# Altium PCB CDS_JETSON_ADAPTER_PCB_v1.0.2.PcbDoc
Units mm, origin at the board's own origin, x right, y up, seen from the top; angles counter-clockwise.
Board outline 70 x 50 mm, 2 copper layers (Top Layer, Bottom Layer); 71 components, 58 nets, 289 pads, 162 vias.
Unrouted connection lines stored in the file: 53.
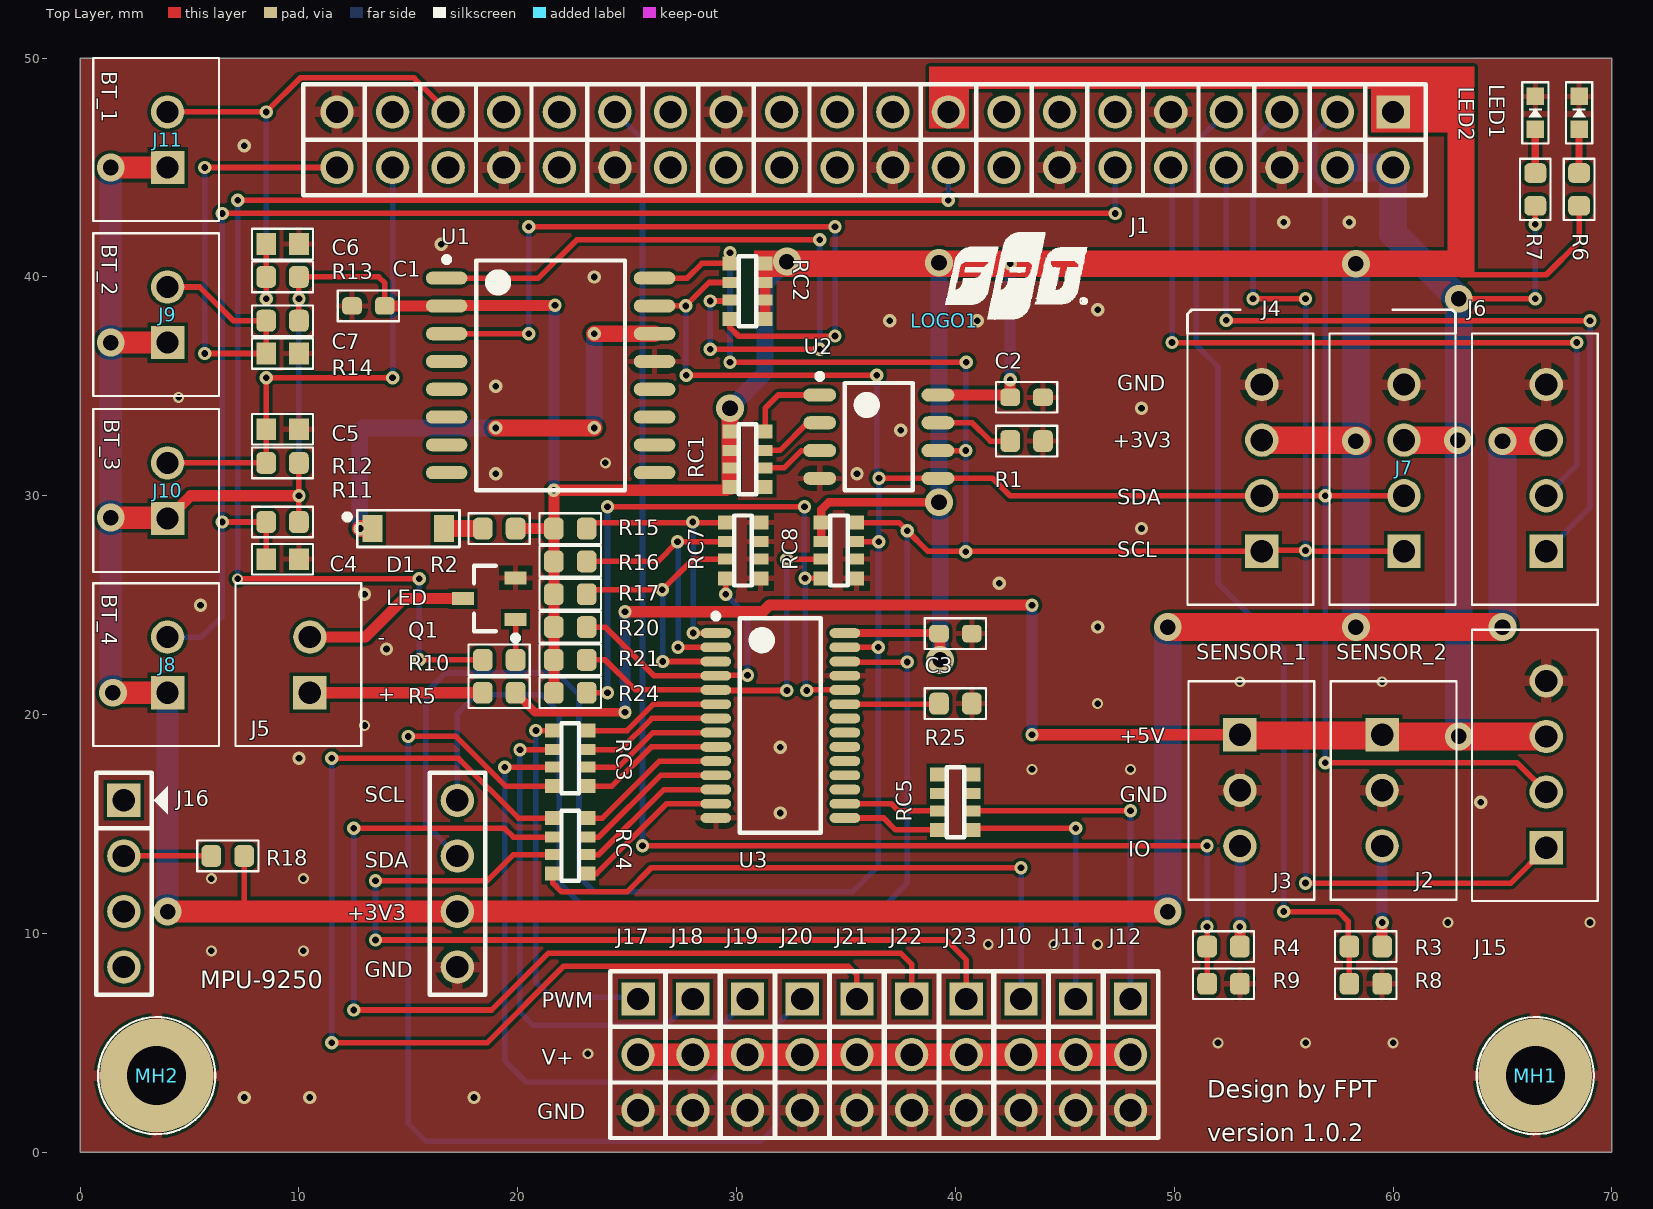
[diagram p0: Top Layer view]
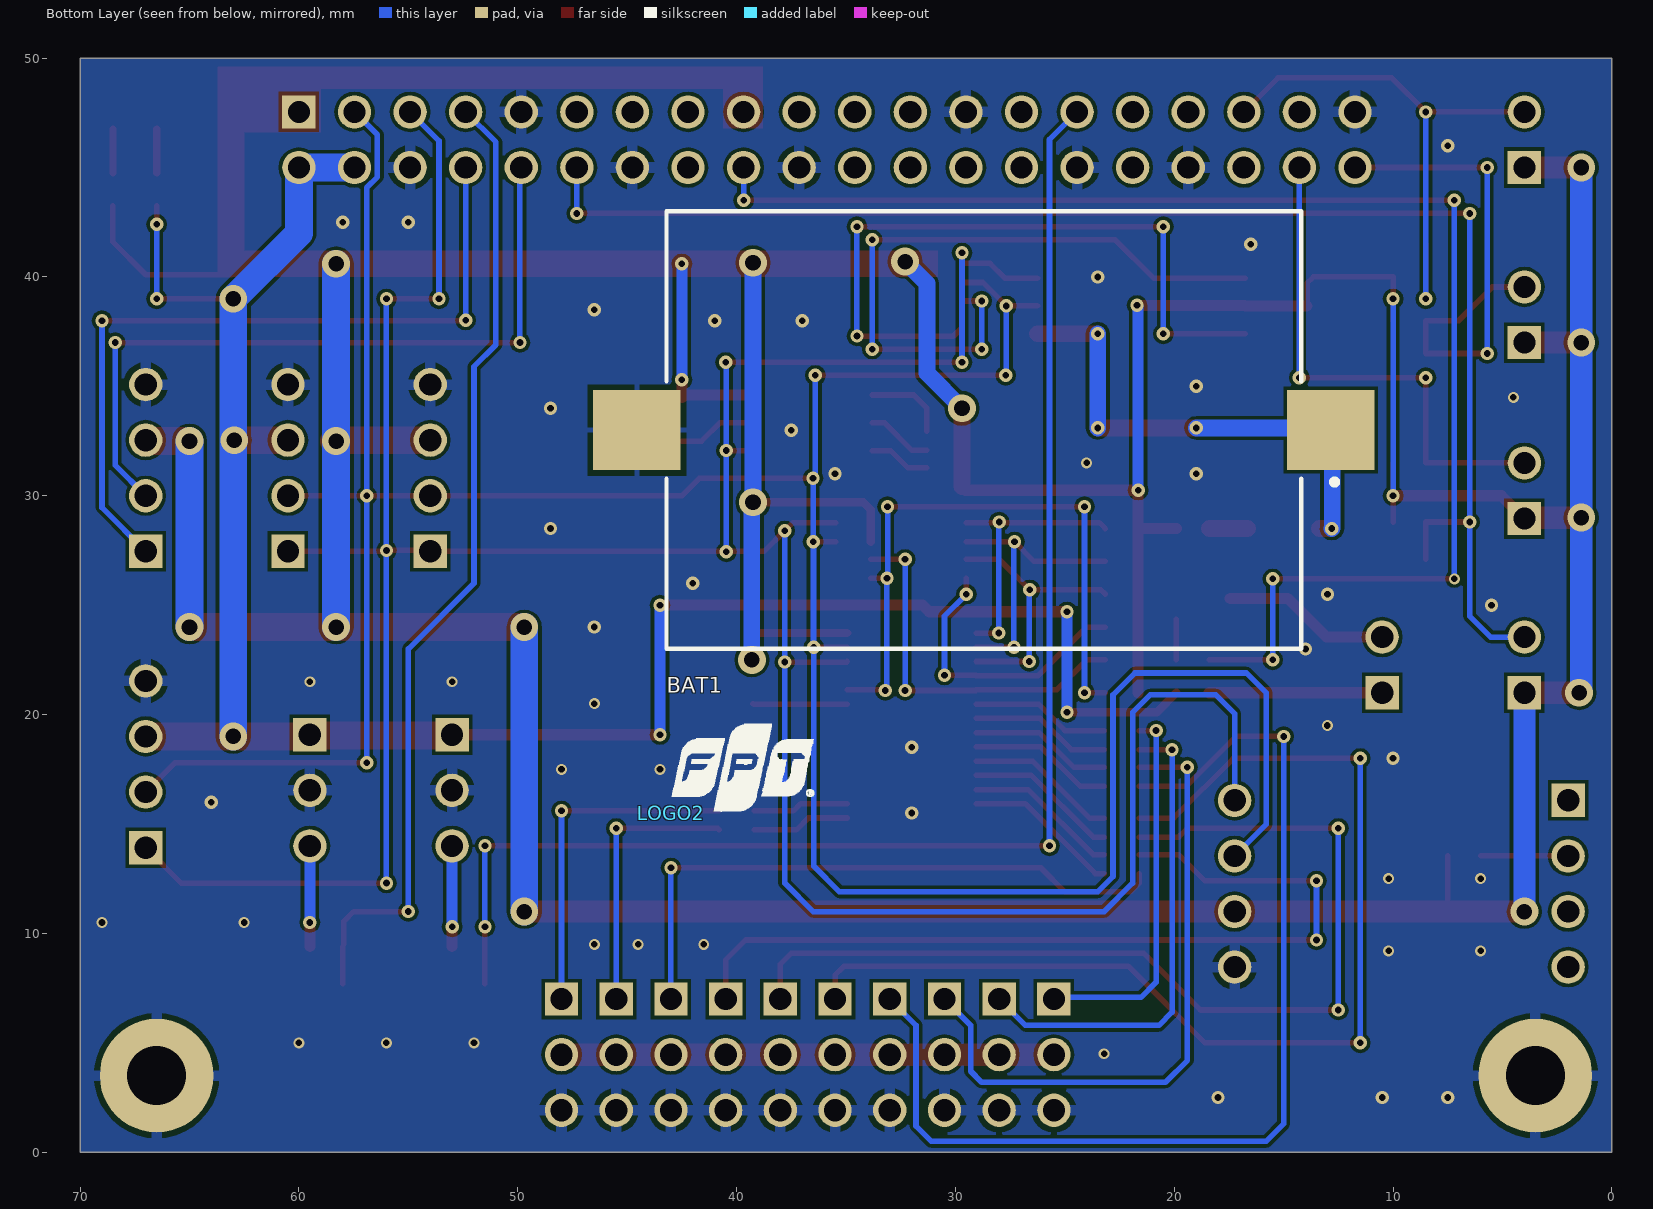
[diagram p1: Bottom Layer view, seen from below]

## Layer stack, top to bottom
Top Solder: solder mask 0.0102, Solder Resist, Dk 3.5
Top Layer: signal copper 0.0356
Dielectric 1: dielectric 0.32, FR-4, Dk 4.8
Bottom Layer: signal copper 0.0356
Bottom Solder: solder mask 0.0102, Solder Resist, Dk 3.5

## Board outline
0,0 70,0 70,50 0,50

## Design rules (kind name [scope] priority, off if disabled: settings)
Clearance [All] p1: gap=0.152 ignorepadtopadclearanceinfootprint=FALSE
PolygonConnect [All] p1: thpad.connectstyle=Relief thpad.reliefconductorwidth=0.508 thpad.reliefentries=4 thpad.polygonreliefangle="90 Angle" thpad.airgapwidth=0.254 smdpad.connectstyle=Relief smdpad.reliefconductorwidth=0.254 smdpad.reliefentries=4 smdpad.polygonreliefangle="90 Angle" smdpad.airgapwidth=0.254 via.connectstyle=Direct via.reliefconductorwidth=0.254 via.reliefentries=4 via.polygonreliefangle="90 Angle" via.airgapwidth=0.254
RoutingVias [All] p1: holewidth=0.711 width=1.27 viastyle="Through Hole" minholewidth=0.3 minwidth=0.5 maxholewidth=0.711 maxwidth=1.27
SolderMaskExpansion [All] p1: expansion=0.102
Width [All] p1: maxlimit=1.27 minlimit=0.203 preferedwidth=0.254
30 further rules are at their usual default settings.

## Components (designator, comment, footprint, x,y, rotation, side; value= is the part's Value field where it differs from the comment)
BAT1 "BU2032SM-HD-G" BU2032SM-HD-G 28.7,33 r0 bottom locked
C1 "GRM188R61A106ME69D" C0603#1 13.175,38.675 r180 top value=1uF
C2 "GRM188R70J104KA01D" C0603#1 43.25,34.5 r180 top value=0.1uF
C3 "GRM188R61C106KAALD" C0603#1 40,23.7 r0 top value=10uF
C4 "GCM188R71H104KA57J" C0603#2 9.25,27.1 r180 top value=0.1uF
C5 "GCM188R71H104KA57J" C0603#2 9.25,33.04 r180 top value=0.1uF
C6 "GCM188R71H104KA57J" C0603#2 9.25,41.5 r180 top value=0.1uF
C7 "GCM188R71H104KA57J" C0603#2 9.25,36.5 r180 top value=0.1uF
D1 "1N4148W-7-F" DO-SOD-123 15,28.5 r0 top
J1 "HDR_2x20" HEADER_SOCKET_2.54MM_2x20 60,47.54 r180 top
J2 "HDR_1x3" B3B-XH-A(LF)(SN) 59.5,16.54 r270 top
J3 "HDR_1x3" B3B-XH-A(LF)(SN) 53,16.54 r270 top
J4 "HDR_1x4" B4B-XH-A(LF)(SN) 54,27.46 r90 top
J5 "HDR_1x2" B2B-XH-A(LF)(SN) 10.5,21 r90 top
J6 "HDR_1x4" B4B-XH-A(LF)(SN) 67,27.46 r90 top
J7 "HDR_1x4" B4B-XH-A(LF)(SN) 60.5,27.46 r90 top
J8 "HDR_1x2" B2B-XH-A(LF)(SN) 4,21 r90 top
J9 "HDR_1x2" B2B-XH-A(LF)(SN) 4,37 r90 top
J10 "HDR_1x2" B2B-XH-A(LF)(SN) 4,28.96 r90 top
J10 "HDR_1x3" PINHEAD_2.54mm_1x3 43,7 r270 top
J11 "HDR_1x2" B2B-XH-A(LF)(SN) 4,45 r90 top
J11 "HDR_1x3" PINHEAD_2.54mm_1x3 45.5,7 r270 top
J12 "HDR_1x3" PINHEAD_2.54mm_1x3 48,7 r270 top
J15 "HDR_1x4" B4B-XH-A(LF)(SN) 67,13.92 r90 top
J16 "SOCKET_MPU_9250" SOCKET_MPU_9250 2,16.08 r0 top locked
J17 "HDR_1x3" PINHEAD_2.54mm_1x3 25.5,7 r270 top
J18 "HDR_1x3" PINHEAD_2.54mm_1x3 28,7 r270 top
J19 "HDR_1x3" PINHEAD_2.54mm_1x3 30.5,7 r270 top
J20 "HDR_1x3" PINHEAD_2.54mm_1x3 33,7 r270 top
J21 "HDR_1x3" PINHEAD_2.54mm_1x3 35.5,7 r270 top
J22 "HDR_1x3" PINHEAD_2.54mm_1x3 38,7 r270 top
J23 "HDR_1x3" PINHEAD_2.54mm_1x3 40.5,7 r270 top
LED1 "LTST-C191KRKT" LED-SMD-0603-RED 68.5,47.5 r270 top
LED2 "LTST-C191KRKT" LED-SMD-0603-RED 66.5,47.5 r270 top
LOGO1 "LOGOFPT" LOGO_FPT 39.5,38 r0 top
LOGO2 "LOGOFPT" LOGO_FPT 43,15.5 r180 bottom
MH1 "MTH27" MH_5.2MMD_2.7MMD 66.5,3.5 r0 top locked
MH2 "MTH27" MH_5.2MMD_2.7MMD 3.5,3.5 r0 top locked
Q1 "MMBT3904" MMBT3904 18.7,25.3 r180 top
R1 "RC0603JR-074K7L" R0603 43.25,32.5 r0 top value=4.7K
R2 "RC0603JR-07200RL" R0603 19.15,28.5 r180 top value=200R
R3 "RC0603JR-07200RL" R0603 58.75,9.4 r0 top value=200R
R4 "RC0603JR-07200RL" R0603 52.25,9.4 r0 top value=200R
R5 "RC0603FR-071KL" R0603 19.15,21 r180 top value=1K
R6 "RC0603FR-071KL" R0603 68.5,44 r90 top value=1K
R7 "RC0603FR-071KL" R0603 66.5,44 r90 top value=1K
R8 "RC0603FR-073K3L" R0603 58.75,7.7 r0 top value=3.3K
R9 "RC0603FR-073K3L" R0603 52.25,7.7 r0 top value=3.3K
R10 "RC0603JR-0710KL" R0603 19.15,22.5 r0 top value=10K
R11 "RC0603JR-0710KL" R0603 9.25,28.8 r0 top value=10K
R12 "RC0603JR-0710KL" R0603 9.25,31.5 r0 top value=10K
R13 "RC0603JR-0710KL" R0603 9.25,40 r0 top value=10K
R14 "RC0603JR-0710KL" R0603 9.25,38 r0 top value=10K
R15 "RC0603JR-070RL" R0603 22.4,28.5 r0 top value=0R
R16 "RC0603JR-070RL" R0603 22.4,27 r0 top value=0R
R17 "RC0603JR-070RL" R0603 22.4,25.5 r0 top value=0R
R18 "RC0603JR-0710KL" R0603 6.75,13.54 r180 top value=10K
R20 "RC0603JR-070RL" R0603 22.4,24 r0 top value=0R
R21 "RC0603JR-070RL" R0603 22.4,22.5 r0 top value=0R
R24 "RC0603JR-070RL" R0603 22.4,21 r0 top value=0R
R25 "RC0603JR-0710KL" R0603 40,20.5 r0 top value=10K
RC1 "YC164-JR-074K7L" RC_1206 30.5,31.675 r90 top value=4.7K
RC2 "YC164-JR-074K7L" RC_1206 30.5,39.345 r270 top value=4.7K
RC3 "YC164-JR-07220RL" RC_1206 22.4,18 r270 top value=220R
RC4 "YC164-JR-07220RL" RC_1206 22.4,14 r270 top value=220R
RC5 "YC164-JR-07220RL" RC_1206 40,16 r90 top value=220R
RC7 "YC164-JR-0710KL" RC_1206 30.3,27.5 r90 top value=10K
RC8 "YC164-JR-0710KL" RC_1206 34.673,27.5 r90 top value=10K
U1 "DS3231S#T&R" SOIC127P1030X265-16N 21.5,35.5 r0 top
U2 "CAT24C32WI-GT3" SOIC127P600X175-8N 36.5,32.7 r0 top
U3 "PCA9685PW" TSOP65P640X110-28N 32,19.5 r0 top

## Footprints (in the part's own frame and the unit in brackets; to place one, negate y for a bottom-side part, rotate by r counter-clockwise, add the part's x,y. Pads: shape width x height; smd on the part's side, far side on the other; paste and mask are expansions set on the pad)
B2B-XH-A(LF)(SN) [mil] "CONN HEADER XH TOP 2POS 2.5MM"
  rect 60x60 hole 40: 1(0,0)
  round 60 hole 40: 2(100,0)
  silkscreen extent -96,-93 197,134, body extent -96,-93 195,134, height 276
B3B-XH-A(LF)(SN) [mil]
  rect 60x60 hole 40: 1(-100,0)
  round 60 hole 40: 2(0,0) 3(100,0)
  silkscreen extent -196,-93 197,134, body extent -195,-93 195,133, height 276
B4B-XH-A(LF)(SN) [mil]
  rect 60x60 hole 40: 1(0,0)
  round 60 hole 40: 2(100,0) 3(200,0) 4(300,0)
  silkscreen extent -96,-93 392,134, body extent -96,-93 392,134, height 276
BU2032SM-HD-G [mm] "SODFL, 2-Leads, Body 20.00x32.00mm, IPC Medium Density"
  rect 4x3.65 smd: 1(-15.858,0) 2(15.858,0)
  silkscreen extent -16.15,-10 14.5,10, body extent -16,-10 16,10, height 5.3
C0603#1 [mm]
  rrect50% 0.9x0.8 smd: 1(-0.75,0) 2(0.75,0)
  silkscreen extent -1.4,-0.7 1.4,0.7, body extent -0.8,-0.4 0.8,0.41, height 0.87
C0603#2 [mm]
  rect 0.9x1 smd: 1(-0.75,0) 2(0.75,0)
  silkscreen extent -1.4,-0.7 1.4,0.7, body extent -0.8,-0.4 0.8,0.41, height 0.87
DO-SOD-123 [mil]
  rect 36x48 smd: 1(-64.5,0) 2(64.5,0)
  silkscreen extent -115,-33 92,33, body extent -76,-27 76,27, height 32
HEADER_SOCKET_2.54MM_2x20 [mil]
  rect 60x60 hole 40: 1(0,0)
  round 60 hole 40: 2(0,100) 3(100,0) 4(100,100) 5(200,0) 6(200,100) 7(300,0) 8(300,100) 9(400,0) 10(400,100) 11(500,0) 12(500,100) 13(600,0) 14(600,100) 15(700,0) 16(700,100) 17(800,0) 18(800,100) 19(900,0) 20(900,100) 21(1000,0) 22(1000,100) 23(1100,0) 24(1100,100) 25(1200,0) 26(1200,100) 27(1300,0) 28(1300,100) 29(1400,0) 30(1400,100) 31(1500,0) 32(1500,100) 33(1600,0) 34(1600,100) 35(1700,0) 36(1700,100) 37(1800,0) 38(1800,100) 39(1900,0) 40(1900,100)
  silkscreen extent -59,-50 1961,150, body extent -60,-47 1960,147, height 372
LED-SMD-0603-RED [mm] "Chip Diode, 2-Leads, Body 1.60x0.80mm, IPC Medium Density"
  rect 0.8x0.8 smd: A(0.75,0) C(-0.75,0)
  silkscreen extent -1.4,-0.6 1.4,0.6, body extent -0.8,-0.4 0.8,0.4, height 0.6
LOGO_FPT [mm]
  silkscreen extent 0.04,0.06 6.54,4.05
MH_5.2MMD_2.7MMD [mm]
  round 5.2 / inner round 3.683 / far side round 5.2 hole 2.7: 1(0,0)
  silkscreen extent -2.68,-2.68 2.68,2.68
MMBT3904 [mm] "SOT23, 3-Leads, Body 2.92x2.37mm, Pitch 0.95mm, IPC Medium Density"
  rect 1x0.6 smd: 1(-1.2,0.95) 2(-1.2,-0.95) 3(1.2,0)
  silkscreen extent -1.33,-1.5 0.7,1.92, body extent -1.5,-1.5 1.5,1.5, height 1.3
PINHEAD_2.54mm_1x3 [mil]
  rect 60x60 hole 40: 1(0,0)
  round 60 hole 40: 2(100,0) 3(200,0)
  silkscreen extent -50,-50 250,50, body extent -53,-53 253,53, height 340
R0603 [mm]
  rrect50% 0.9x1 smd: 1(-0.75,0) 2(0.75,0)
  silkscreen extent -1.4,-0.7 1.4,0.7, body extent -0.8,-0.4 0.8,0.4, height 0.45
RC_1206 [mm] "Chip Resistor Array 47R - 221 KR"
  rect 0.64x0.7 smd: 1(-1.27,-0.8) 4(1.27,-0.8) 5(1.27,0.8) 8(-1.27,0.8)
  rect 0.5x0.7 smd: 2(-0.4,-0.8) 3(0.4,-0.8) 6(0.4,0.8) 7(-0.4,0.8)
  silkscreen extent -1.6,-0.4 1.6,0.4, body extent -1.68,-0.88 1.68,0.88, height 0.71
SOCKET_MPU_9250 [mil]
  rect 60x60 hole 40: 1(0,0)
  round 60 hole 40: 2(0,-100) 3(0,-200) 4(0,-300) 5(600,-300) 6(600,-200) 7(600,-100) 8(600,0)
  silkscreen extent -50,-350 650,50, body extent -54,-590 652,79, height 575
SOIC127P600X175-8N [mm] "SOIC, 8-Leads, Body 4.90x3.90mm, Pitch 1.27mm, IPC Medium Density"
  oval 1.5x0.6 smd: 1(-2.7,1.905) 2(-2.7,0.635) 3(-2.7,-0.635) 4(-2.7,-1.905) 5(2.7,-1.905) 6(2.7,-0.635) 7(2.7,0.635) 8(2.7,1.905)
  silkscreen extent -2.82,-2.45 1.55,2.88, body extent -3,-2.45 3,2.45, height 1.75
SOIC127P1030X265-16N [mm] "SOIC, 16-Leads, Body 10.30x7.50mm, Pitch 1.27mm, IPC Medium Density"
  oval 1.9x0.6 smd: 1(-4.75,4.445) 2(-4.75,3.175) 3(-4.75,1.905) 4(-4.75,0.635) 5(-4.75,-0.635) 6(-4.75,-1.905) 7(-4.75,-3.175) 8(-4.75,-4.445) 9(4.75,-4.445) 10(4.75,-3.175) 11(4.75,-1.905) 12(4.75,-0.635) 13(4.75,0.635) 14(4.75,1.905) 15(4.75,3.175) 16(4.75,4.445)
  silkscreen extent -4.87,-5.25 3.4,5.42, body extent -5.15,-5.25 5.15,5.25, height 2.65
TSOP65P640X110-28N [mm] "TSOP, 28-Leads, Body 9.70x4.40mm, Pitch 0.65mm, IPC Medium Density"
  oval 1.4x0.45 smd: 1(-2.95,4.225) 2(-2.95,3.575) 3(-2.95,2.925) 4(-2.95,2.275) 5(-2.95,1.625) 6(-2.95,0.975) 7(-2.95,0.325) 8(-2.95,-0.325) 9(-2.95,-0.975) 10(-2.95,-1.625) 11(-2.95,-2.275) 12(-2.95,-2.925) 13(-2.95,-3.575) 14(-2.95,-4.225) 15(2.95,-4.225) 16(2.95,-3.575) 17(2.95,-2.925) 18(2.95,-2.275) 19(2.95,-1.625) 20(2.95,-0.975) 21(2.95,-0.325) 22(2.95,0.325) 23(2.95,0.975) 24(2.95,1.625) 25(2.95,2.275) 26(2.95,2.925) 27(2.95,3.575) 28(2.95,4.225)
  silkscreen extent -3.07,-4.9 1.85,5.12, body extent -3.2,-4.9 3.2,4.9, height 1.1

## Part data
BAT1: "=Description", Manufacturer Name=MPD, Manufacturer Part Description="HOLDER COIN CELL 2032 SMD", Operating Temperature="-40°C ~ 280°C", Part Name="Battery Holder", Battery Cell Size="Coin, 20mm", Battery Series=2032, Battery Type="Coin Cell, Holder", Height=5.28mm, Manufacturer Part Number=BU2032SM-HD-G, Mounting Type="PCB, Surface Mount", Part Number=BU2032SM-HD-G, Series=-, Style=Holder, Supplier Name=Digi-Key, Termination Style="SMD (SMT) Tab"
C1: "CAP CER 10UF 10V X5R 0603", Manufacturer Name=Murata, Operating Temperature="-55°C ~ 85°C", Package="0603 (1608 Metric)", Part Name=CAP-CERAMIC-0603, Rated Voltage=10V, Tolerance=±20%, Manufacturer Part Number=GRM188R61A106ME69D, Part Number=GRM188R61A106ME69D, Supplier Name=Digi-Key
C2: "CAP CER 0.1UF 6.3V X7R 0603", Manufacturer Name=Murata, Operating Temperature="-55°C ~ 125°C", Package="0603 (1608 Metric)", Part Name=CAP-CERAMIC-0603, Rated Voltage=6.3V, Tolerance=10%, Manufacturer Part Number=GRM188R70J104KA01D, Part Number=GRM188R70J104KA01D, Supplier Name=Digi-Key
C3: "CAP CER 10UF 16V X5R 0603", Manufacturer Name=Murata, Operating Temperature="-55°C ~ 125°C", Package="0603 (1608 Metric)", Part Name=CAP-CERAMIC-0603, Rated Voltage=16V, Tolerance=±10%, Manufacturer Part Number=GRM188R61C106KAALD, Part Number=GRM188R61C106KAALD, Supplier Name=Digi-Key
C4 C5 C6 C7: "CAP CER 0.1UF 50V X7R 0603", Manufacturer Name=Murata, Operating Temperature="-55°C ~ 125°C", Package=0603, Part Name=CAP-CERAMIC-0603, Rated Voltage=50V, Tolerance=±10%, Part Number=GCM188R71H104KA57J, Supplier Name=Digi-Key
D1: "DIODE GEN PURP 100V 300MA SOD123", Capacitance="2pF @ 0V, 1MHz", Current Average Rectified (Io)="300mA (DC)", Current Reverse Leakage @ Vr="1µA @ 75V", Manufacturer Name="Diodes Incorporated", Operating Temperature="-55°C ~ 150°C (TJ)", Voltage DC Reverse (Vr) (Max)=100V, Voltage Forward (Vf) (Max)="1.25V @ 150mA", Manufacturer Part Number=1N4148W-7-F, Part Name=1N4148W-7-F, Part Number=1N4148W-7-F, Reverse Recovery Time (trr)=4ns, Speed=#NAME?, Supplier Name=Digi-Key, Type=Standard
J1: library part SSW-120-03-G-D, "CONN RCPT .100\" 40POS DUAL GOLD", Manufacturer Name="Samtec Inc.", Part Name=HEADER_SOCKET_2.54MM_2x20, Supplier Part Number=Digi-Key, Connector Type=Receptacle, Contact Type=Forked, Number of Positions/Contacts=40, Part Number=SSW-120-03-G-D, Series=SSW
J2 J3: library part B3B-XH-A(LF)(SN), Connector Type=Header, Contact Type="Male Pin", Part Name=B3B-XH-A(LF)(SN), Part Number=B3B-XH-A(LF)(SN), Series=XH
J4 J6 J7 J15: library part B4B-XH-A(LF)(SN), "CONN HEADER XH TOP 4POS 2.5MM", Manufacturer Name="JST Sales America Inc.", Supplier Part Number=Digi-Key, Connector Type=Header, Contact Type="Male Pin", Number of Positions/Contacts=4, Part Number=B4B-XH-A(LF)(SN), Series=XH
J5 J8 J9 J10 J11: library part B2B-XH-A(LF)(SN), "CONN HEADER XH TOP 2POS 2.5MM", Manufacturer Name="JST Sales America Inc", Supplier Part Number=Digi-Key, Connector Type="Header, Shrouded", Contact Type="Male Pin", Number of Positions/Contacts=2, Part Number=B2B-XH-A(LF)(SN), Series=XH
J10 J11 J12 J17 J18 J19 J20 J21 J22 J23: library part 61300311121, "CONN HEADER 3 POS 2.54", Manufacturer Name="Wurth Electronics Inc.", Supplier Part Number=Digi-Key, Connector Type=Header, Contact Type="Male Pin", Number of Positions/Contacts=3, Part Name=HDR_1x3, Part Number=61300311121, Series=WR-PHD
J16: library part MPU_9250, Part Name=MPU_9250, Part Number=MPU_9250
LED1 LED2: "LED RED CLEAR 0603 SMD", Current - Test=20mA, Led Color=Red, Lens Color=Colorless, Manufacturer Name="Lite-One Inc.", Millicandela Rating=54mcd, Package="0603 (1608 Metric)", Part Name=LED-SMD-1608-55, Voltage - Forward (Vf) (Typ)=2V, Height Max=0.55mm, Lens Style/Size="Rectangle with Flat Top, 1.10mm x 0.80mm", Lens Transparency=Clear, Manufacturer Part Number=LTST-C191KRKT, Mounting Type="Surface Mount", Part Number=LTST-C191KRKT, Supplier Name=Digi-Key, Viewing Angle=130°, Wavelength - Dominant=631nm, Wavelength - Peak=639nm
LOGO1 LOGO2: library part LOGO-FPT, "=Description", Manufacturer Part Description="FPT Logo", Part Name=LOGO, Part Number=LOGO-FPT
MH1 MH2: "=Description", Manufacturer Part Description="Mouting Hole 2.7mm", Part Name=MTH27, Part Number=MTH27
Q1: "TRANS NPN 40V 0.2A SOT23", Frequency - Transition=350mW, Manufacturer Name="Fairchild/ON Semiconductor", Operating Temperature="-55°C ~ 150°C (TJ)", Package=SOT-23-3, Part Name=TRANS-NPN, Supplier Part Number 1=MMBT3904FSDKR-ND, Voltage - Collector Emitter Breakdown (Max)=40V, ComponentLink1Description="Manufacturer Link", ComponentLink1URL=http://www.semiconductors.philips.com/, ComponentLink2Description=Datasheet, ComponentLink2URL=http://www.semiconductors.philips.com/acrobat/datasheets/MMBT3904_4.pdf, DatasheetVersion=13-May-2002, LatestRevisionDate=12-Dec-2006, LatestRevisionNote="IPC-7351 Footprint Added.", PackageDescription="3-Pin SOT-23 Package 0.95 mm Pitch, 2.3 mm Lead Span", PackageReference=SOT23, PackageVersion=May-1999, Part Number=MMBT3904, Published=17-Sep-2003, Publisher="Altium Limited", Supplier 1=Digi-Key, Supplier Name=Digi-Key, Type=NPN
R1: "RES SMD 4.7K OHM 5% 1/10W 0603", Manufacturer Name=Yageo, Operating Temperature="-55°C ~ 155°C", Package=0603, Part Name=RES-0603, Rated Power=0.1W, Tolerance=±5%, Manufacturer Part Number=RC0603JR-074K7L, Part Number=RC0603JR-074K7L, Supplier Name=Digi-Key
R2 R3 R4: "RES SMD 200 OHM 5% 1/10W 0603", Manufacturer Name=Yageo, Operating Temperature="-55°C ~ 155°C", Package=0603, Part Name=RES-0603, Rated Power=0.1W, Tolerance=±5%, Manufacturer Part Number=RC0603JR-07200RL, Part Number=RC0603JR-07200RL, Supplier Name=Digi-Key
R5 R6 R7: "RES SMD 1K OHM 1% 1/10W 0603", Manufacturer Name=Yageo, Operating Temperature="-55°C ~ 155°C", Package=0603, Part Name=RES-0603, Rated Power=0.15W, Tolerance=1%, Manufacturer Part Number=RC0603FR-071KL, Part Number=RC0603FR-071KL, Supplier Name=Digi-Key
R8 R9: "RES SMD 3.3K OHM 1% 1/10W 0603", Manufacturer Name=Yageo, Operating Temperature="-55°C ~ 155°C", Package=0603, Part Name=RES-0603, Rated Power=0.1W, Tolerance=±1%, Manufacturer Part Number=RC0603FR-073K3L, Part Number=RC0603FR-073K3L, Supplier Name=Digi-Key
R10 R11 R12 R13 R14 R18 R25: "RES SMD 10K OHM 5% 1/10W 0603", Manufacturer Name=Yageo, Operating Temperature="-55°C ~ 155°C", Package=0603, Part Name=RES-0603, Rated Power=0.1W, Tolerance=±5%, Manufacturer Part Number=RC0603JR-0710KL, Part Number=RC0603JR-0710KL, Supplier Name=Digi-Key
R15 R16 R17 R20 R21 R24: "RES SMD 0.0OHM JUMPER 1/10W 0603", Manufacturer Name=Yageo, Operating Temperature="-55°C ~ 155°C", Package=0603, Part Name=RES-0603, Rated Power=0.15W, Tolerance=1%, Manufacturer Part Number=RC0603JR-070RL, Part Number=RC0603JR-070RL, Supplier Name=Digi-Key
RC1 RC2: "RES ARRAY 4 RES 4.7K OHM 1206", Manufacturer Name=Yageo, Operating Temperature="-55°C ~ 155°C", Package=1206, Part Name=RC, Rated Power=0.1W, Tolerance=±5%, Manufacturer Part Number=YC164-JR-074K7L, Part Number=YC164-JR-074K7L, Supplier Name=Digi-Key
RC3 RC4 RC5: "RES ARRAY 4 RES 220 OHM 1206", Manufacturer Name=Yageo, Operating Temperature="-55°C ~ 155°C", Package=1206, Part Name=RC, Rated Power=0.1W, Tolerance=±5%, Manufacturer Part Number=YC164-JR-07220RL, Part Number=YC164-JR-07220RL, Supplier Name=Digi-Key
RC7 RC8: "RES ARRAY 4 RES 10K OHM 1206", Manufacturer Name=Yageo, Operating Temperature="-55°C ~ 155°C", Package=1206, Part Name=RC, Rated Power=0.1W, Tolerance=±5%, Manufacturer Part Number=YC164-JR-0710KL, Part Number=YC164-JR-0710KL, Supplier Name=Digi-Key
U1: "IC RTC CLK/CALENDAR I2C 16-SOIC", Current - Timekeeping (Max)="110µA ~ 170µA @ 3.63V ~ 5.5V", Manufacturer Name=Maxim, Operating Temperature="0°C ~ 70°C", Voltage - Supply="2.3 V ~ 5.5 V", Date Format=YY-MM-DD-dd, Interface="I²C, 2-Wire Serial", Manufacturer Part Number=DS3231S#T&R, Part Name=DS3231S#T&R, Part Number=DS3231S#T&R, Serial=-, Supplier Name=Digi-key, Time Format="HH:MM:SS (12/24 hr)", Type=Clock/Calendar, Voltage - Supply, Battery="2.3 V ~ 5.5 V"
U2: "IC EEPROM 32K I2C 1MHZ 8SOIC", Manufacturer Name="ON Semiconductor", Operating Temperature="-40°C ~ 85°C (TA)", Package=8-SOIC, Voltage Supply="1.7 V ~ 5.5 V", Interface=I2C, Manufacturer Part Number=CAT24C32WI-GT3, Memory Size=32Kb(4Kx8), Memory Type=Non-Volatile, Part Name=CAT24C32WI-GT3, Part Number=CAT24C32WI-GT3, Series=-, Speed=1mhZ, Supplier Name=Digi-Key
U3: "IC LED DRIVER RGBA 28-TSSOP", Current - Output / Channel=25mA, Frequency=-, Manufacturer Name="NXP USA Inc.", Manufacturer Part Number=PCA9685PW,118, Operating Temperature="-40°C ~ 85°C (TA)", Voltage - Output=5.5V, Voltage - Supply (Min)=2.3V, Applications=Backlight, Dimming=PWM, Internal Switch(s)=Yes, Number of Outputs=16, Part Name=PCA9685PW, Part Number=PCA9685PW, Serial=-, Supplier Name=Digi-key, Topology=-, Type=Linear, Voltage - Supply (Max)=5.5V

## Via types
v1: diameter 0.61, hole 0.305, Top Layer to Bottom Layer, tented both sides, 120 vias
v2: diameter 0.5, hole 0.3, Top Layer to Bottom Layer, tented both sides, 22 vias
v3: diameter 1.27, hole 0.711, Top Layer to Bottom Layer, tented both sides, 20 vias

## Nets (pads, with @x,y where several pads share a name; then routed paths per layer and width w, separated by ;. In a path a pad name is that pad's centre, name@x,y a point inside that pad or via, vN(x,y) a via of type N, cw(c..) or ccw(c..) an arc to the next point about the centre after c; other vN are vias at no path point)
32K: RC2.3 U1.1 | length 30.9
  Top Layer w0.254: U1.1 20.945,39.945 22.7,41.7 v1(33.8,41.7) ; v1(28.8,36.7) v1(33.8,36.7) ; v1(28.8,38.9) 29.655,38.9 RC2.3
  Bottom Layer w0.254: v1(28.8,36.7) v1(28.8,38.9) ; v1(33.8,36.7) v1(33.8,41.7)
+3V3_VDC: C1.1 C2.2 C3.1 J1.1 J1.17 J4.3 J6.3 J8.1 J9.1 J10.1@4,28.96 J11.1@4,45 J16.6 R2.1 R6.1 R11.2 R12.2 R13.2 R14.2 R15.1 R16.1 R17.1 R18.1 R20.1 R21.1 R24.1 RC1.5 RC1.6 RC1.7 RC1.8 RC2.5 RC2.6 RC2.7 RC2.8 RC8.5 RC8.6 U1.2 U2.8 U3.28 | length 274.9
  Top Layer w0.254: 7.5,11 R18.1 ; R11.2 v1(10,30) R12.2 ; R14.2 v1(10,39) R13.2 13.645,40 13.925,39.72 C1.1 ; 63.1,40.1 67,40.1 68.5,41.6 R6.1
  Top Layer w0.381: RC8.6 RC8.5 33.873,29.373 34.2,29.7 v3(39.25,29.7) v3@39.3,29.7 ; U3.28 C3.1@39.225,23.725
  Top Layer w0.508: J10.1@4,28.96 5.04,30 v1(10,30) ; C1.1 U1.2 16.775,38.7 v1(21.7,38.7) ; R2.1 R15.1 ; R24.1 R21.1 R20.1 R17.1 R16.1 R15.1 ; RC1.8 29.545,30.25 v1(21.65,30.25) R15.1 ; RC2.5 RC2.6 RC2.7 RC2.8 ; U2.8 42.395,34.605 C2.2 v1(42.5,35.3) ; C3.1@39.225,23.725 C3.1 39.2,23.65 39.3,23.55 v3(39.3,22.5) ; v3(58.3,40.6) v3@58.3,40.7
  Top Layer w0.762: RC1.8 v3(29.7,34)
  Top Layer w1.016: v3(1.4,29) J10.1@4,29 ; v3(1.4,37) J9.1 ; v3(1.4,45) J11.1@4,45 ; v3(1.5,21) J8.1 ; v3(4,11) 7.5,11 J16.6 v3(49.7,11)
  Top Layer w1.27: v3(49.7,24) v3(58.3,24) v3(65,24) ; J4.3 58.36,32.54 58.4,32.5 v3(58.3,32.5) ; v3(65,32.5) 66.96,32.5 J6.3
  Bottom Layer w0.254: v1(10,30) v1(10,39)
  Bottom Layer w0.508: v1(21.65,30.25) v1@21.65,38.65 ; v1(42.5,35.3) v1(42.5,40.6)
  Bottom Layer w0.762: v3(29.7,34) 31.3,35.6 31.3,39.7 v3(32.3,40.7) ; v3(39.25,40.65) v3(39.25,29.7) 39.3,29.65 v3(39.3,22.5)
  Bottom Layer w1.016: v3(1.4,45) v3(1.4,37) v3(1.4,29) 1.4,21.1 v3(1.5,21) ; v3(4,11) J8.1
  Bottom Layer w1.27: v3(49.7,11) v3(49.7,24) ; v3(58.3,24) v3(58.3,32.5) v3(58.3,40.6) ; v3(65,24) v3(65,32.5)
+5V_VDC: J1.2 J1.4 J2.1 J3.1 J7.3 J15.3 R5.1 R7.1 | length 98.3
  Top Layer w0.254: v3(63,39) v1(66.5,39) ; v1(66.5,42.4) R7.1
  Top Layer w0.381: R5.1 20.8,20.1 v1(24.9,20.1)
  Top Layer w0.508: v1(24.9,24.7) 31.2,24.7 31.5,25 v1(43.5,25) ; v1(43.5,19.08) J3.1
  Top Layer w1.27: J3.1@52.95,19.04 59.41,19.04 J2.1@59.45,19.08 ; J2.1@59.53,19 v3(63,19) J15.3 ; J7.3 v3(62.96,32.54)
  Bottom Layer w0.254: v1(66.5,39) v1(66.5,42.4)
  Bottom Layer w0.508: v1(24.9,20.1) v1(24.9,24.7) ; v1(43.5,19.08) v1(43.5,25)
  Bottom Layer w1.27: J1.4 J1.2 60,42 v3(63,39) v3@63,32.5 ; J2.1@59.45,19.08 J2.1@59.53,19 ; v3(62.96,32.54) v3@63,32.5 ; v3(63,19) v3@63,32.5
\O\E\: R25.1 U3.23 | length 4.3
  Top Layer w0.254: U3.23 39.225,20.475 R25.1
A0: R15.2 RC7.5 U3.1 | length 12.6
  Top Layer w0.254: R15.2 23.42,28.77 RC7.5 ; v1(28.025,23.725) U3.1
  Bottom Layer w0.254: v1(28,28.8) 28.025,28.775 v1(28.025,23.725)
A1: R16.2 RC7.6 U3.2 | length 13.1
  Top Layer w0.254: R16.2 26.4,27 v1(27.3,27.9) ; v1(27.325,23.075) U3.2 ; v1@27.5,27.9 RC7.6
  Bottom Layer w0.254: v1(27.3,27.9) 27.325,27.875 v1(27.325,23.075)
A2: R17.2 RC7.7 U3.3 | length 12.7
  Top Layer w0.254: R17.2 23.35,25.7 v1(26.6,25.7) 28,27.1 RC7.7 ; v1(26.625,22.425) U3.3
  Bottom Layer w0.254: v1(26.6,25.7) 26.625,25.675 v1(26.625,22.425)
A3: R20.2 RC7.8 U3.4 | length 13.1
  Top Layer w0.254: R20.2 24,24 26.225,21.775 U3.4 29.075,21.8 v1(30.5,21.8) ; v1(29.5,25.5) RC7.8
  Bottom Layer w0.254: v1(29.5,25.5) 30.5,24.5 v1(30.5,21.8)
A4: R21.2 RC8.7 U3.5 | length 17.3
  Top Layer w0.254: R21.2 24,22.5 25.375,21.125 U3.5 29.075,21.1 v1(32.3,21.1) ; v1(32.3,27.1) RC8.7
  Bottom Layer w0.254: v1(32.3,21.1) v1(32.3,27.1)
A5: R24.2 RC8.8 U3.24 | length 29.3
  Top Layer w0.254: R24.2 v1(24.1,21) ; v1(24.1,29.5) v1(33.1,29.5) ; v1(33.13,26.23) RC8.8 ; v1(33.2,21.1) 33.225,21.125 U3.24
  Bottom Layer w0.254: v1(24.1,21) v1(24.1,29.5) ; v1(33.1,29.5) 33.1,26.26 v1(33.13,26.23) v1@33.13,21.13
ANODE: J5.1 R5.2 | length 7.9
  Top Layer w0.508: J5.1 R5.2
BAT: BAT1.1 D1.1 U1.14 | length 22.9
  Top Layer w0.762: v1(12.8,28.5) D1.1 ; v1(19,33.1) v1(23.5,33.1) ; v1(23.5,37.4) 23.505,37.405 U1.14
  Bottom Layer w0.762: v1(12.8,28.5) 12.784,28.516 12.784,33 BAT1.1 12.942,33.1 v1(19,33.1) ; v1(23.5,33.1) v1(23.5,37.4)
CATHODE: J5.2 Q1.3 | length 7.7
  Top Layer w0.508: J5.2 13.04,23.54 14.8,25.3 Q1.3@17.45,25.3
GND: BAT1.2 C1.2 C2.1 C3.2 C4.1 C5.1 C6.1 C7.1 J1.6 J1.9 J1.14 J1.20 J1.25 J1.30 J1.34 J1.39 J2.2 J3.2 J4.4 J6.4 J7.4 J10.3 J11.3 J12.3 J15.4 J16.5 J17.3 J18.3 J19.3 J20.3 J21.3 J22.3 J23.3 LED1.C LED2.C MH1.1 MH2.1 Q1.2 R1.2 R8.2 R9.2 R25.2 RC7.1 RC7.2 RC7.3 RC7.4 RC8.1 RC8.2 U1.13 U2.4 U3.14 U3.25
  other v1: 7.5,2.5 10.5,2.5 18,2.5 32,15.5 64,16 10,18 32,18.5 14,23 46.5,24 5.5,25 13,25.5 42,26 48.5,28.5 19,31 35.5,31 37.5,33 48.5,34 19,35 37,38 41,38 46.5,38.5 23.5,40 16.5,41.5 55,42.5 58,42.5 7.5,46
  other v2: 23.2,4.5 52,5 56,5 60,5 6,9.2 10.2,9.2 41.5,9.5 44.5,9.5 46.5,9.5 62.5,10.5 69,10.5 6,12.5 10.2,12.5 43.5,17.5 48,17.5 13,19.5 46.5,20.5 53,21.5 59.5,21.5 24,31.5 4.5,34.5
GPIO_392: C4.2 J1.12 J8.2 R11.1 | length 67.9
  Top Layer w0.254: v1(6.5,28.8) R11.1 C4.2 ; v1(6.5,42.9) v1(47.3,42.9)
  Bottom Layer w0.254: J8.2 5.54,23.54 6.5,24.5 v1(6.5,28.8) v1(6.5,42.9) ; v1(47.3,42.9) J1.12
GPIO_393: C7.2 J1.40 J9.2 R14.1 | length 24
  Top Layer w0.254: J9.2 5.46,39.54 7,38 R14.1 C7.2 v1(5.7,36.5) ; v1(5.7,45) J1.40
  Bottom Layer w0.254: v1(5.7,36.5) v1(5.7,45)
GPIO_394: C5.2 J1.38 J10.2@4,31.5 R12.1 | length 23.8
  Top Layer w0.254: J10.2@4,31.5 R12.1 C5.2 v1(8.5,35.4) v1(14.28,35.4)
  Bottom Layer w0.254: v1(14.28,35.4) J1.38
GPIO_395: C6.2 J1.35 J11.2@4,47.54 R13.1 | length 25.2
  Top Layer w0.254: J11.2@4,47.54 v1(8.5,47.54) 10.06,49.1 15.26,49.1 J1.35 ; v1(8.5,39) R13.1 C6.2
  Bottom Layer w0.254: v1(8.5,39) v1(8.5,47.54)
GPIO_396: J1.7 R3.1 R8.1 | length 44.7
  Top Layer w0.254: v1(55,11) 57.5,11 57.95,10.55 R3.1@57.95,9.5 ; R8.1 R3.1
  Bottom Layer w0.254: J1.7 51,46.16 51,36.9 52,35.9 52,26 55,23 v1(55,11)
GPIO_398: J1.29 R4.1 R9.1 | length 66.2
  Top Layer w0.254: v1@25.74,13.96 v1(25.7,14) v1(51.5,14) ; R9.1 R4.1 v1(51.5,10.3)
  Bottom Layer w0.254: J1.29 25.7,46.28 v1(25.7,14) ; v1(51.5,10.3) v1(51.5,14)
GPIO_481: J1.18 R10.1 | length 66.2
  Top Layer w0.254: v2(7.2,26.2) v1(15.5,26.2) ; v1(7.2,43.5) v1(39.68,43.5) ; v1(15.5,22.5) R10.1
  Bottom Layer w0.254: v2(7.2,26.2) v1(7.2,43.5) ; v1(15.5,22.5) v1(15.5,26.2) ; v1(39.68,43.5) J1.18
LED_0: RC3.8 U3.6 | length 6.3
  Top Layer w0.254: RC3.8 24.996,19.27 26.201,20.475 U3.6
LED_1: RC3.7 U3.7 | length 6.4
  Top Layer w0.254: RC3.7 24.701,18.4 26.126,19.825 U3.7
LED_2: RC3.6 U3.8 | length 6.5
  Top Layer w0.254: RC3.6 24.6,17.6 26.175,19.175 U3.8
LED_3: RC3.5 U3.9 | length 6.6
  Top Layer w0.254: RC3.5 24.305,16.73 26.1,18.525 U3.9
LED_4: RC4.8 U3.10 | length 6.9
  Top Layer w0.254: RC4.8 23.87,15.27 26.475,17.875 U3.10
LED_5: RC4.7 U3.11 | length 7
  Top Layer w0.254: RC4.7 23.7,14.4 26.525,17.225 U3.11
LED_6: RC4.6 U3.12 | length 7.1
  Top Layer w0.254: RC4.6 23.7,13.6 26.675,16.575 U3.12
LED_7: RC4.5 U3.13 | length 7.2
  Top Layer w0.254: RC4.5 23.604,12.73 26.799,15.925 U3.13
LED_8: RC5.8 U3.15 | length 4.5
  Top Layer w0.254: U3.15 36.725,15.275 37.27,14.73 RC5.8
LED_9: RC5.7 U3.16 | length 4.4
  Top Layer w0.254: U3.16 37.075,15.925 37.4,15.6 RC5.7
NetD1_2: D1.2 R2.2 | length 1.8
  Top Layer w0.762: D1.2 R2.2
NetJ2_3: J2.3 R3.2 | length 4.6
  Top Layer w0.508: R3.2 v1(59.5,10.5)
  Bottom Layer w0.508: v1(59.5,10.5) J2.3
NetJ3_3: J3.3 R4.2 | length 4.6
  Top Layer w0.508: R4.2 v1(53,10.3)
  Bottom Layer w0.508: v1(53,10.3) J3.3
NetJ16_2: J16.2 R18.2 | length 4
  Top Layer w0.254: J16.2 R18.2
NetLED1_A: LED1.A R6.2 | length 2
  Top Layer w0.33: R6.2 LED1.A
NetLED2_A: LED2.A R7.2 | length 2
  Top Layer w0.33: R7.2 LED2.A
NetQ1_1: Q1.1 R10.2 | length 1.9
  Top Layer w0.254: R10.2 Q1.1
NetR1_1: R1.1 U2.7 | length 3.6
  Top Layer w0.254: U2.7 40.765,33.335 41.6,32.5 R1.1
NetRC1_2: RC1.2 U2.3 | length 2.8
  Top Layer w0.254: RC1.2 32.175,31.275 32.965,32.065 U2.3
NetRC1_3: RC1.3 U2.2 | length 3
  Top Layer w0.254: RC1.3 31.975,32.075 33.235,33.335 U2.2
NetRC1_4: RC1.4 U2.1 | length 3.8
  Top Layer w0.254: RC1.4 31.3,34 31.905,34.605 U2.1
PWM_0: J17.1 RC3.1 | length 17.1
  Top Layer w0.254: v1(20.83,19.27) RC3.1
  Bottom Layer w0.254: v1(20.83,19.27) 20.83,7.77 21.52,7.08 25.42,7.08 J17.1@25.423,7.077
PWM_1: J18.1 RC3.2 | length 22.1
  Top Layer w0.254: v1(20.1,18.4) RC3.2
  Bottom Layer w0.254: v1(20.1,18.4) 20.1,6.4 20.7,5.8 26.8,5.8 J18.1
PWM_2: J19.1 RC3.3 | length 29.9
  Top Layer w0.254: v1(19.4,17.6) RC3.3
  Bottom Layer w0.254: v1(19.4,17.6) 19.4,4.2 20.4,3.2 28.8,3.2 29.3,3.7 29.3,5.8 J19.1
PWM_3: J20.1 RC3.4 | length 49
  Top Layer w0.254: v1(15,19) 17.174,19 19.444,16.73 RC3.4
  Bottom Layer w0.254: v1(15,19) 15,1.3 15.8,0.5 31.1,0.5 31.8,1.2 31.8,5.8 J20.1
PWM_4: J21.1 RC4.1 | length 50.9
  Top Layer w0.254: v1(11.5,5) 18.6,5 22.1,8.5 35.1,8.5 35.5,8.1 J21.1 ; v1(11.5,18) 17.3,18 20.03,15.27 RC4.1
  Bottom Layer w0.254: v1(11.5,5) v1(11.5,18)
PWM_5: J22.1 RC4.2 | length 45.9
  Top Layer w0.254: v1(12.5,6.5) 18.8,6.5 21.4,9.1 37.5,9.1 38,8.6 J22.1 ; v1(12.5,14.8) 19.4,14.8 19.8,14.4 RC4.2
  Bottom Layer w0.254: v1(12.5,6.5) v1(12.5,14.8)
PWM_6: J23.1 RC4.3 | length 40.5
  Top Layer w0.254: v1(13.5,9.7) 39.584,9.7 40.5,8.784 J23.1 ; v1(13.5,12.4) 18.6,12.4 19.8,13.6 RC4.3
  Bottom Layer w0.254: v1(13.5,9.7) v1(13.5,12.4)
PWM_7: J10.1@43,7 RC4.4 | length 28.5
  Top Layer w0.254: RC4.4 21.6,12.3 22,11.9 25,11.9 26.1,13 v1(43,13)
  Bottom Layer w0.254: J10.1@43,7 v1(43,13)
PWM_8: J11.1@45.5,7 RC5.1 | length 12.5
  Top Layer w0.254: RC5.1 40.87,14.8 v1(45.5,14.8)
  Bottom Layer w0.254: J11.1@45.5,7 v1(45.5,14.8)
PWM_9: J12.1 RC5.2 | length 15.8
  Top Layer w0.254: RC5.2 v1(48,15.6)
  Bottom Layer w0.254: J12.1 v1(48,15.6)
RXD0: J1.10 J6.2 | length 34.1
  Top Layer w0.254: v1(49.9,37) v1(68.4,37)
  Bottom Layer w0.254: J1.10 49.9,44.94 v1(49.9,37) ; J6.2 68.4,31.4 v1(68.4,37)
SCL: J1.5 J4.1 J7.1 J15.1 J16.8 RC2.1 RC8.4 U1.16 U2.6 U3.26 | length 158.4
  Top Layer w0.254: U1.16 27.745,39.945 28.415,40.615 RC2.1 v1(29.7,41.1) ; v1(29.7,36.1) v1(40.5,36.1) ; U3.26 34.975,22.4 v1(37.8,22.4) ; RC8.4 37.43,28.77 v1(37.8,28.4) 38.74,27.46 J4.1 54.04,27.5 v1(56,27.5) 56.04,27.46 J7.1 ; U2.6 v1(40.465,32.065) ; v1(53.6,39) v1(56,39) ; v1(56,12.3) 65.38,12.3 J15.1
  Bottom Layer w0.254: J16.8 17.24,20.04 18.1,20.9 21.1,20.9 21.9,20.1 21.9,12.3 23.2,11 36.5,11 37.8,12.3 v1(37.8,22.4) v1(37.8,28.4) ; v1(29.7,36.1) v1(29.7,41.1) ; v1(40.465,27.435) v1(40.465,32.065) v1@40.465,36.1 ; v1(53.6,39) 53.6,46.22 J1.5 ; v1(56,12.3) v1(56,27.5) v1(56,39)
SDA: J1.3 J4.2 J7.2 J15.2 J16.7 RC2.2 RC8.3 U1.15 U2.5 U3.27 | length 149.7
  Top Layer w0.254: U1.15 v1(27.675,38.675) 28.745,39.745 RC2.2 ; v1(27.7,35.5) v1(36.4,35.5) ; U3.27 v1(36.475,23.075) ; RC8.3 v1(36.5,27.9) ; v1(36.505,30.795) U2.5 41.705,30.795 42.5,30 J4.2 v1(56.9,30) J7.2 ; v1(56.9,17.8) 65.66,17.8 J15.2
  Bottom Layer w0.254: J16.7 15.8,14.98 15.8,21 16.7,21.9 21.8,21.9 22.8,20.9 22.8,12.6 23.5,11.9 35.3,11.9 36.475,13.075 v1(36.475,23.075) 36.475,27.875 v1(36.5,27.9) ; v1(27.675,38.675) 27.675,35.525 v1(27.7,35.5) ; v1(36.4,35.5) 36.4,30.9 v1@36.5,30.8 ; v1@36.5,23 v1(36.5,27.9) ; v1(36.505,30.795) v1@36.5,30.8 ; v1(56.9,17.8) v1(56.9,30) 56.9,44.087 56.419,44.569 56.419,46.499 J1.3 ; v1(36.5,27.9) v1@36.5,30.8
SQW: RC2.4 U1.3 | length 33
  Top Layer w0.254: U1.3 20.495,37.405 v1(20.5,37.4) ; v1(20.5,42.3) v1(34.5,42.3) ; RC2.4 29.7,37.688 30.1,37.288 33.988,37.288 v1(34.5,37.3)
  Bottom Layer w0.254: v1(20.5,37.4) v1(20.5,42.3) ; v1(34.5,37.3) v1(34.5,42.3)
TXD0: J1.8 J6.1 | length 35
  Top Layer w0.254: v1(52.38,38.02) 52.4,38 v1(69,38)
  Bottom Layer w0.254: v1(52.38,38.02) J1.8 ; J6.1 69,29.46 v1(69,38)
V+: J10.2@43,4.46 J11.2@45.5,4.46 J12.2 J17.2 J18.2 J19.2 J20.2 J21.2 J22.2 J23.2 | length 22.5
  Top Layer w1.016: J17.2 J18.2 J19.2 J20.2 J21.2 J22.2 J23.2 43,4.46 45.5,4.46 J12.2
pads on no net: J1.11 J1.13 J1.15 J1.16 J1.19 J1.21 J1.22 J1.23 J1.24 J1.26 J1.27 J1.28 J1.31 J1.32 J1.33 J1.36 J1.37 J16.1 J16.3 J16.4 RC1.1 RC5.3 RC5.4 RC5.5 RC5.6 U1.4 U1.5 U1.6 U1.7 U1.8 U1.9 U1.10 U1.11 U1.12 U3.17 U3.18 U3.19 U3.20 U3.21 U3.22

## Polygon pours and split planes (outlines as drawn)
GND on Top Layer "Top Layer-GND" (solid, remove dead copper, pour order 0): 0,0 70,0 70,50 0,50
GND on Bottom Layer "Bottom Layer-GND" (solid, remove dead copper, pour order 1): 0,0 70,0 70,50 0,50

## Other copper
Top Layer:
  region net +3V3_VDC: 30.8,40 63.7,40 63.7,46.6 63.7,49.6 38.8,49.6 38.8,46.8 40.6,46.8 40.6,48.6 59,48.6 59,46.6 62.5,46.6 62.5,41.2 30.8,41.2
  region net +3V3_VDC: 62.4,47.2
Bottom Layer:
  region: 61.8,49.6

## Silkscreen, mask and mechanical layers (free items; w line width, h text height)
Top Overlay:
  lines w0.127: 50.6,37.42 50.6,38.3 50.8,38.5 53,38.5 ; 60,38.5 62.7,38.5 62.85,38.35 62.85,37.42
  text "BT_1" at 1,49.4 h0.7 r270
  text "BT_2" at 1,41.5 h0.7 r270
  text "GND" at 47.4,34.8 h0.7
  text "BT_3" at 1.1,33.5 h0.7 r270
  text "+3V3" at 47.2,32.2 h0.7
  text "SDA" at 47.4,29.6 h0.7
  text "SCL" at 47.4,27.2 h0.7
  text "BT_4" at 1,25.5 h0.7 r270
  text "LED" at 14,25 h0.7
  text "-" at 13.6,23.2 h0.7
  text "SENSOR_1" at 51,22.5 h0.7
  text "SENSOR_2" at 57.4,22.5 h0.7
  text "+" at 13.6,20.6 h0.7
  text "+5V" at 47.5,18.7 h0.7
  text "SCL" at 13,16 h0.7
  text "GND" at 47.5,16 h0.7
  text "IO" at 47.9,13.5 h0.7
  text "SDA" at 13,13 h0.7
  text "+3V3" at 12.2,10.6 h0.7
  text "GND" at 13,8 h0.7
  text "MPU-9250" at 5.5,7.5 h0.8
  text "PWM" at 21.1,6.6 h0.7
  text "V+" at 21.1,4 h0.7
  text "Design by FPT" at 51.5,2.5 h0.8
  text "GND" at 20.9,1.5 h0.7
  text "version 1.0.2" at 51.5,0.5 h0.8
Drill Drawing:
  the board outline again, w0.254